# Altium PCB lab3_kulikov_heat_control.PcbDoc (part 1 of 2)
Units mm, origin at the board's own origin, x right, y up, seen from the top; angles counter-clockwise.
Board outline 100 x 67.25 mm, 4 copper layers (Top Layer, Signal Layer 1, Signal Layer 2, Bottom Layer), stack 1.522 mm thick; 68 components, 52 nets, 265 pads, 1135 vias.
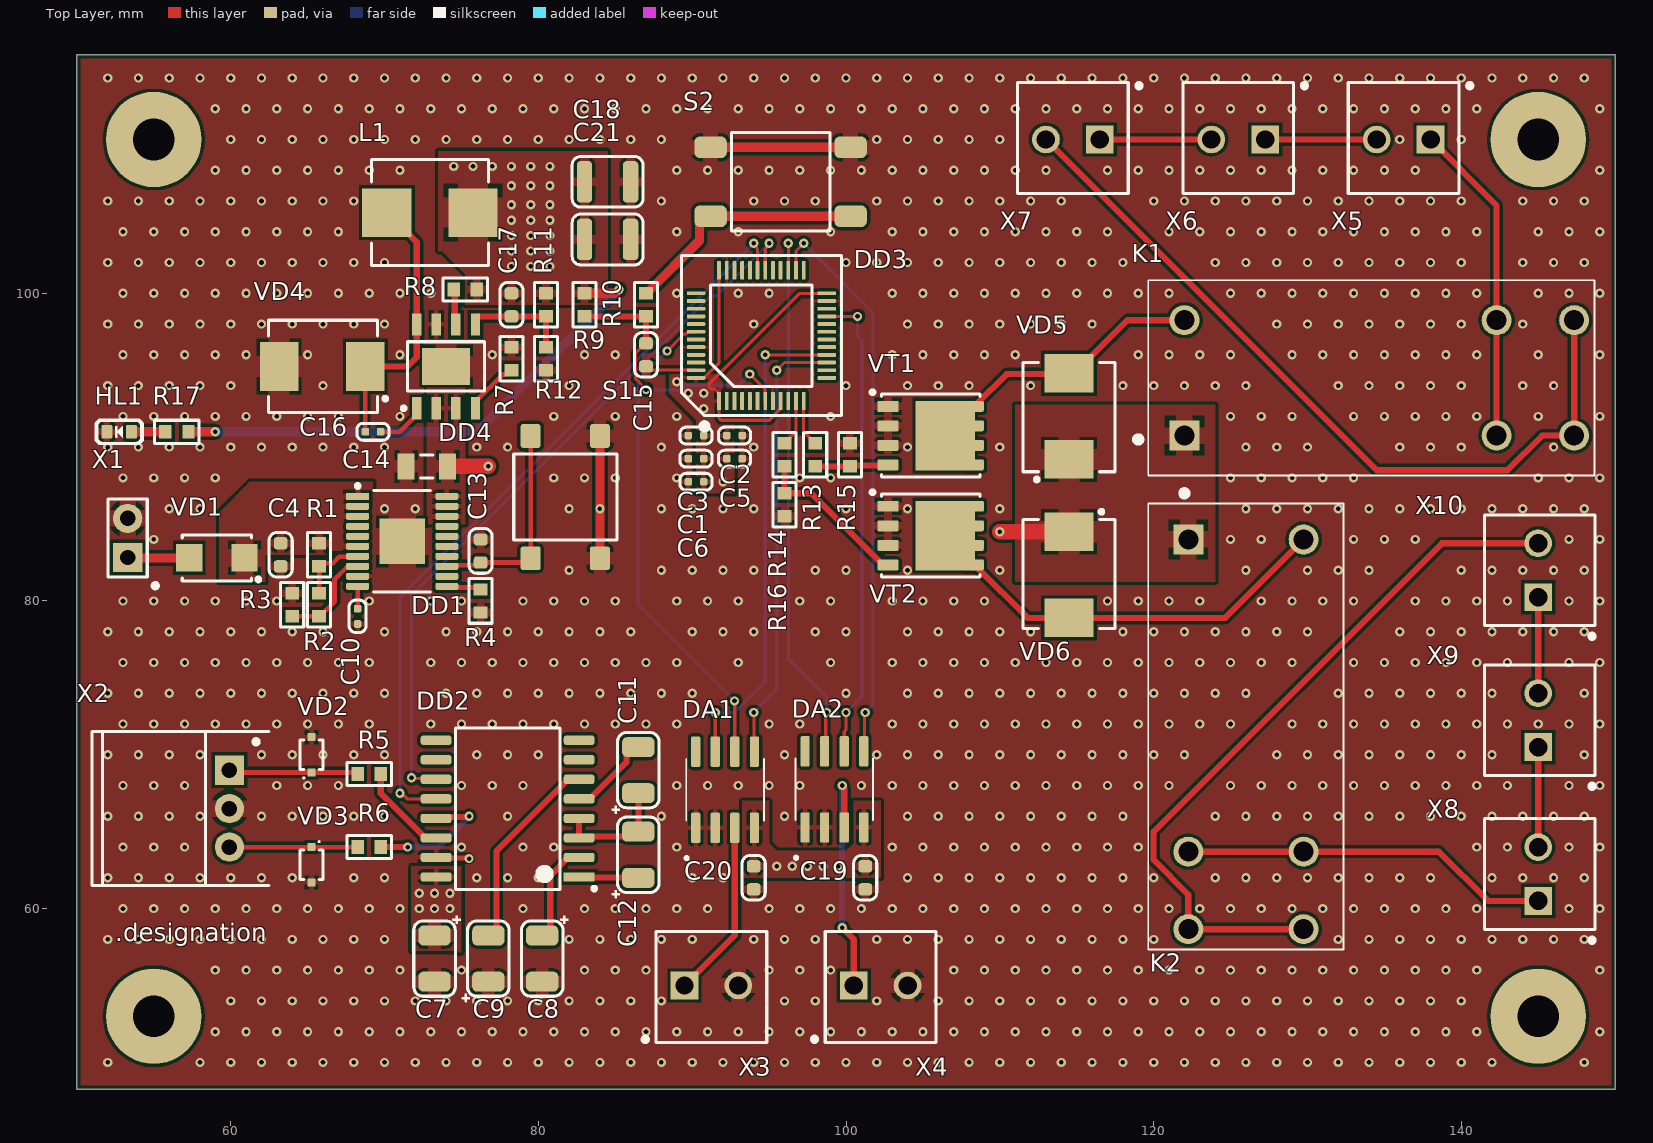
[diagram p0: Top Layer view]
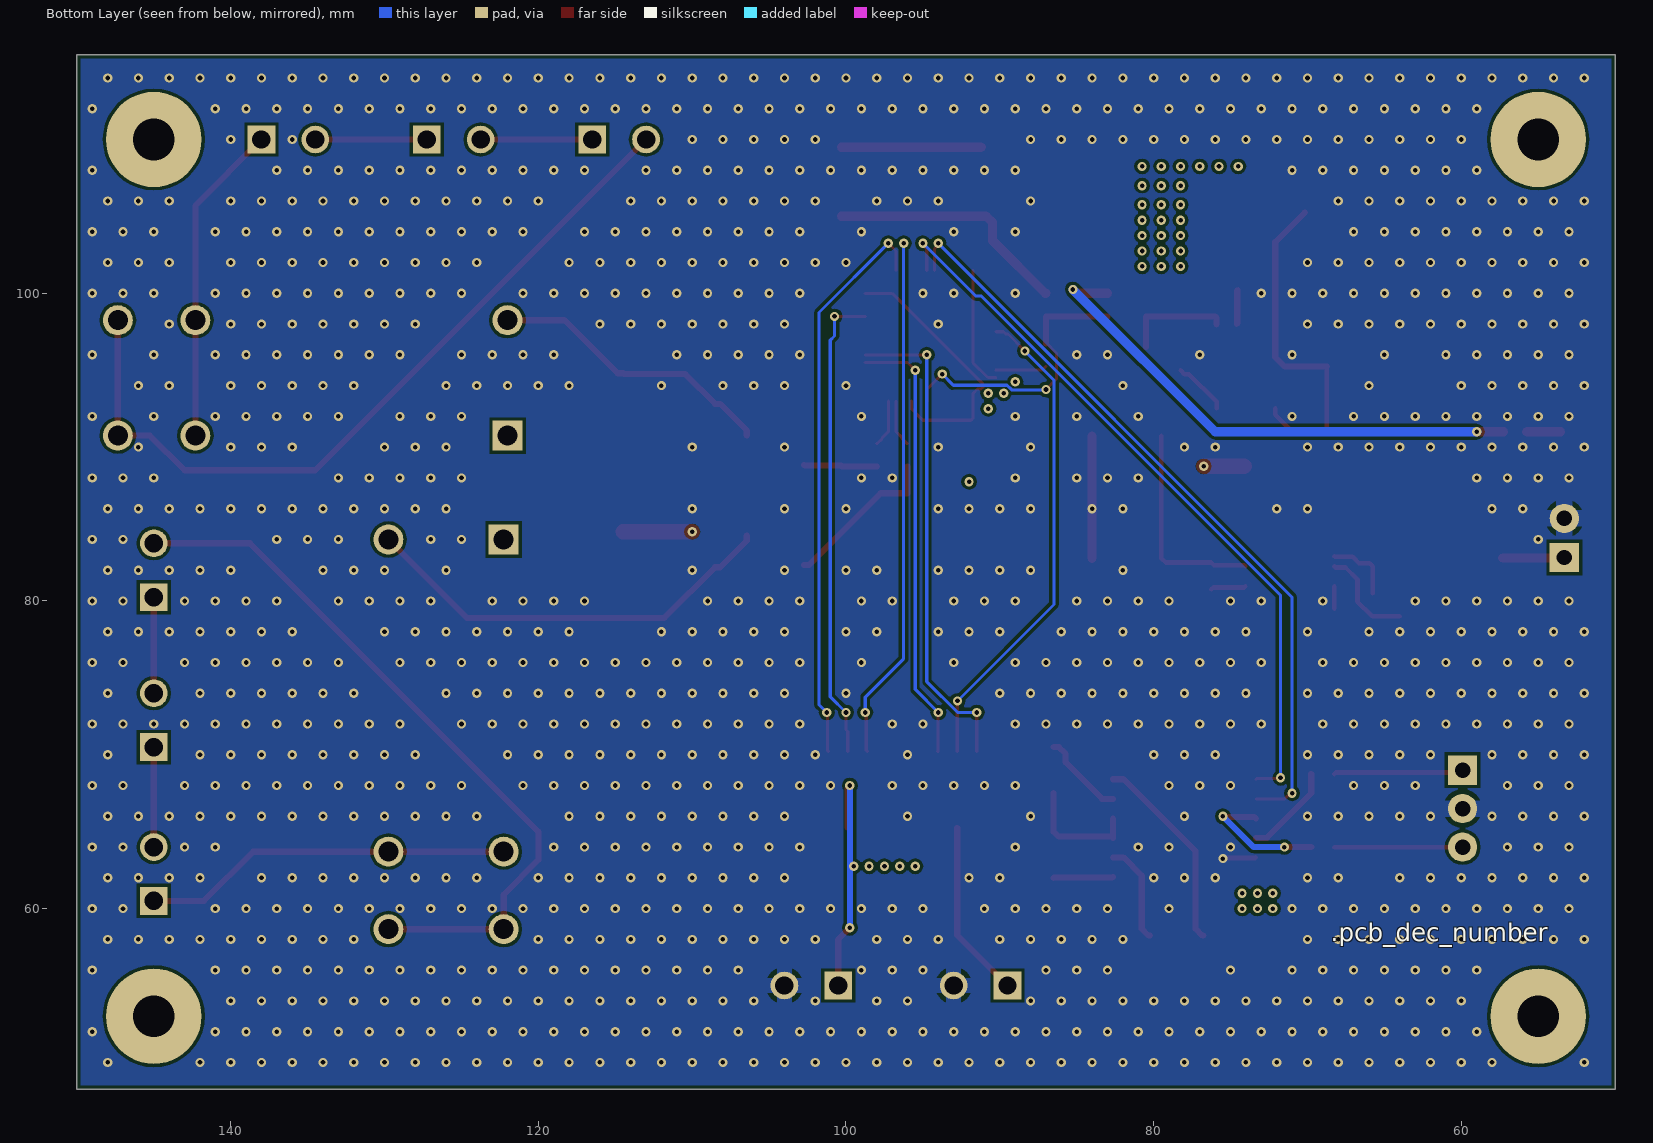
[diagram p1: Bottom Layer view, seen from below]
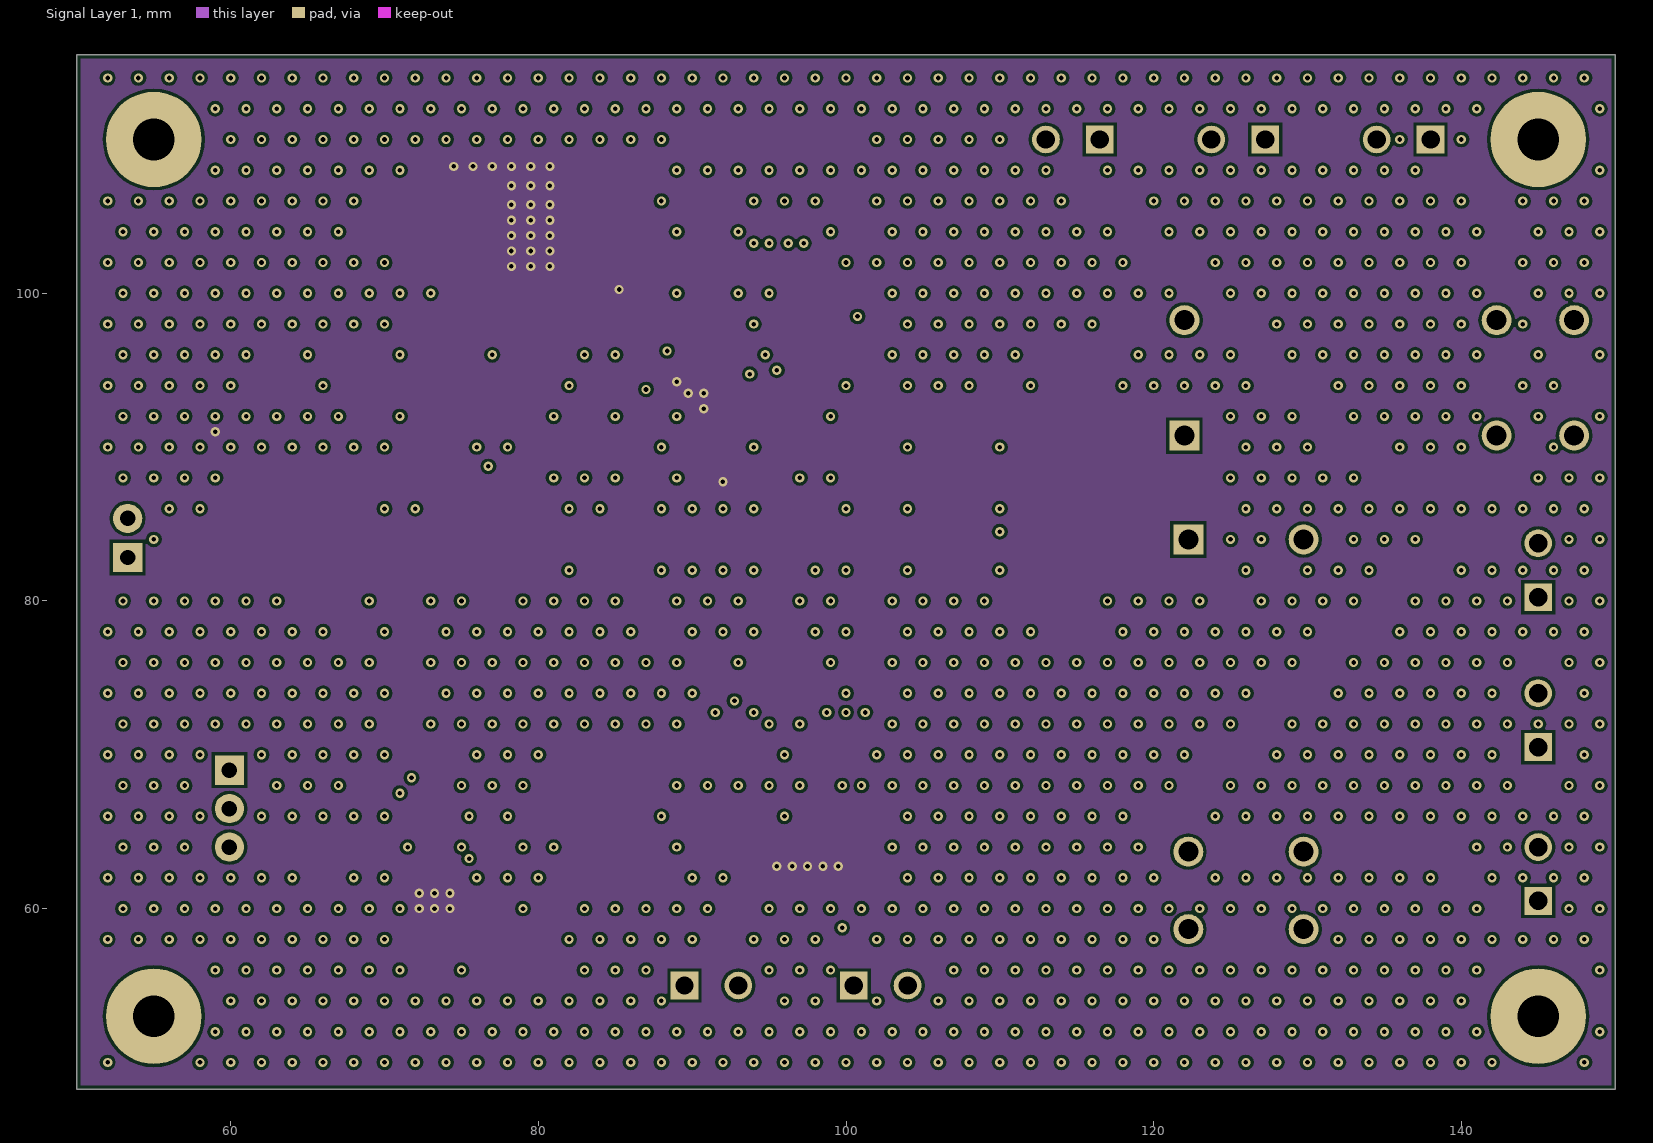
[diagram p2: Signal Layer 1]
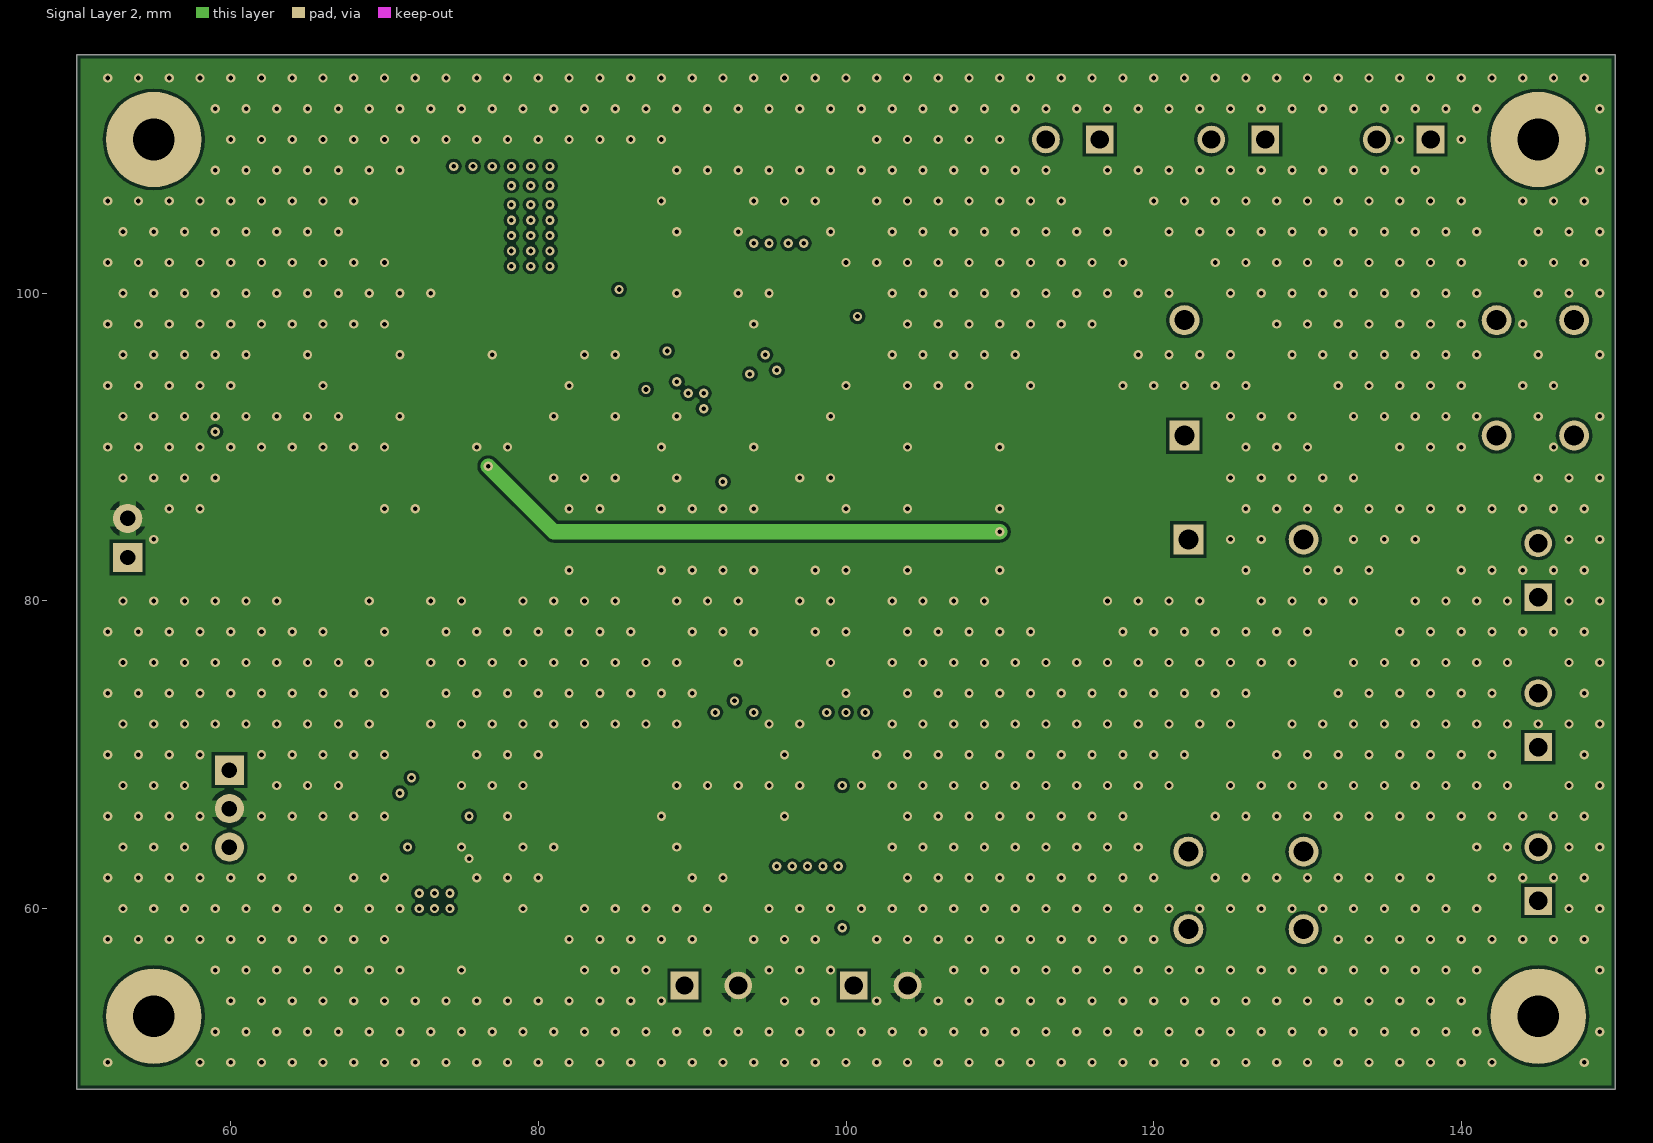
[diagram p3: Signal Layer 2]
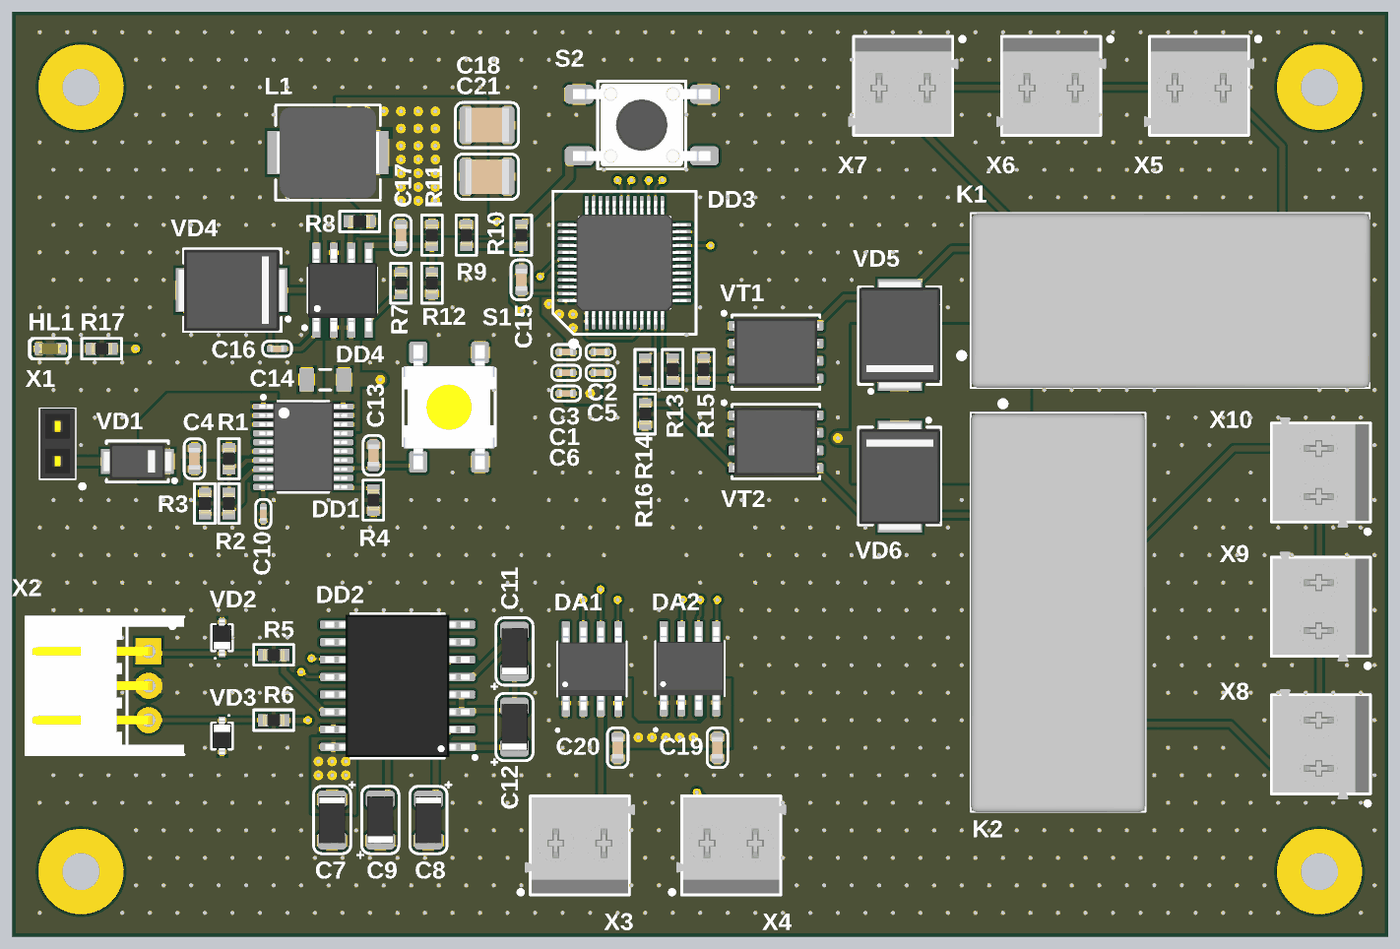
[diagram p4: 3D render of the assembled board from above, using the file's embedded part models]

## Layer stack, top to bottom
Top Solder: solder mask 0.0102, Solder Resist, Dk 3.5
Top Layer: signal copper 0.018
Prepreg 1: prepreg 0.125, FR4 HiTg170, Dk 5.07
Signal Layer 1: signal copper 0.018
Core 1: core 1.2, FR4, Dk 4.6
Signal Layer 2: signal copper 0.018
Prepreg 2: prepreg 0.125, FR4 HiTg170, Dk 5.07
Bottom Layer: signal copper 0.018
Bottom Solder: solder mask 0.0102, Solder Resist, Dk 3.5

## Board outline
50,48.25 50,115.5 150,115.5 150,48.25

## Design rules (kind name [scope] priority, off if disabled: settings)
AcuteAngle min_acute_angle [OnCopper] p1: minimum=3.50000000000000E+0001 checktracksonly=FALSE // Минимальный угол между примитивами топологии
BoardOutlineClearance board_outline_clearance_std [NOT (OnLayer('Bottom Overlay') OR OnLayer('Top Overlay'))] p1: gap=0.25 ignorepadtopadclearanceinfootprint=FALSE except(0: Arc-SplitContinuation Track-SplitContinuation SMDPad-SplitContinuation THPad-SplitContinuation Via-SplitContinuation Fill-SplitContinuation Poly-SplitContinuation Region-SplitContinuation Text-SplitContinuation) // Отступ элементов топологии от края фрезеруемой печатной платы
Clearance clearance_outer_18um_std [OnTopLayer OR OnBottomLayer] p1: gap=0.125 ignorepadtopadclearanceinfootprint=TRUE except(0.2: Arc-Fill Arc-Poly Track-Fill Track-Poly SMDPad-SMDPad SMDPad-Fill SMDPad-Poly THPad-Fill THPad-Poly Via-Fill Via-Poly Fill-Fill Fill-Poly Poly-Poly Poly-Region Poly-Text; 0.25: Arc-Hole Track-Hole SMDPad-Hole THPad-Hole Via-Hole Fill-Hole Poly-Hole Region-Hole Text-Hole) // Зазоры на внешних слоях
Clearance clearance_inner_18um_std [NOT (OnTopLayer Or OnBottomLayer)] p2: gap=0.125 ignorepadtopadclearanceinfootprint=FALSE except(0.2: Arc-Fill Arc-Poly Track-Fill Track-Poly SMDPad-SMDPad SMDPad-Fill SMDPad-Poly THPad-Fill THPad-Poly Via-Fill Via-Poly Fill-Fill Fill-Poly Poly-Poly Poly-Region Poly-Text; 0.25: Arc-Hole Track-Hole SMDPad-Hole THPad-Hole Via-Hole Fill-Hole Poly-Hole Region-Hole Text-Hole) // Зазоры на внутренних слоях
ComponentClearance [All] p1: gap=0 collisioncheckmode=3 verticalgap=0 showdistances=FALSE
DiffPairsRouting diff_pairs_routing [All] p1: maxlimit=0.254 minlimit=0.127 mostfreqgap=0.254 toplayer_maxgap=0.127 toplayer_prefgap=0.127 toplayer_minwidth=0.143 toplayer_maxwidth=0.143 toplayer_prefwidth=0.143 midlayer1_minwidth=0.381 midlayer1_maxwidth=0.381 midlayer1_prefwidth=0.381 midlayer2_minwidth=0.381 midlayer2_maxwidth=0.381 midlayer2_prefwidth=0.381 bottomlayer_maxgap=0.127 bottomlayer_prefgap=0.127 bottomlayer_minwidth=0.143 bottomlayer_maxwidth=0.143 bottomlayer_prefwidth=0.143 impedanceprofiledriven=TRUE impedanceprofileid={FD46899E-B5A2-4EF5-A302-5D2DB6A51F35} maxuncoupledlength=12.7 // Правила трассировки дифференциальных пар
HoleSize min_hole_size_std [IsPad] p1: absolutevalues=TRUE maxlimit=5.9 minlimit=0.6 maxpercent=80.000 minpercent=20.000 // Диаметр межслойного переходного отверстия
HoleSize min_hole_size_via_std [IsVia] p2: absolutevalues=TRUE maxlimit=5.9 minlimit=0.3 maxpercent=80.000 minpercent=20.000 // Минимальный диаметр монтажного отверстия
HoleToHoleClearance hole_to_hole_clearance_std [All] p1: gap=0.2 allowstackedmicrovias=FALSE // Минимальное расстояние между краями двух отверстий
MinimumAnnularRing min_via_ar_std [All] p1: minimumring=0.15 // Поясок площадки переходного отверстия (Annular ring VIA)
MinimumAnnularRing min_pad_ar_std [All] p2: minimumring=0.2 // Поясок монтажной контактной площадки (Annular ring PAD)
MinimumSolderMaskSliver min_solder_mask_bridge_std [All] p1: minsoldermaskwidth=0.15 // Мнимальная ширина масочного мостика
PlaneClearance plane_clearance_18um_std [All] p1: clearance=0.2 // Отступ полигона (для слоя plane) от элементов топологии
PlaneConnect [All] p1: planeconnectstyle=Relief reliefexpansion=0.5 reliefentries=4 reliefconductorwidth=0.2 reliefairgap=0.2
PolygonConnect poly_connect_to_pad<=0.3 [(AsMM(PadXSize_AllLayers)<=0.301) or (AsMM(PadYSize_AllLayers)<=0.301)] p1: thpad.connectstyle=Relief thpad.reliefconductorwidth=0.2 thpad.reliefentries=4 thpad.polygonreliefangle="90 Angle" thpad.airgapwidth=0.2 smdpad.connectstyle=Relief smdpad.reliefconductorwidth=0.2 smdpad.reliefentries=4 smdpad.polygonreliefangle="90 Angle" smdpad.airgapwidth=0.2 via.connectstyle=Direct via.reliefconductorwidth=0.254 via.reliefentries=4 via.polygonreliefangle="90 Angle" via.airgapwidth=0.254 // Правила подключения полигонов для падов от 0,3мм и меньше
PolygonConnect poly_connect_to_pad<=0.4 [(AsMM(PadXSize_AllLayers)<=0.401) or (AsMM(PadYSize_AllLayers)<=0.401)] p2: thpad.connectstyle=Relief thpad.reliefconductorwidth=0.26 thpad.reliefentries=4 thpad.polygonreliefangle="90 Angle" thpad.airgapwidth=0.2 smdpad.connectstyle=Relief smdpad.reliefconductorwidth=0.26 smdpad.reliefentries=4 smdpad.polygonreliefangle="90 Angle" smdpad.airgapwidth=0.2 via.connectstyle=Direct via.reliefconductorwidth=0.254 via.reliefentries=4 via.polygonreliefangle="90 Angle" via.airgapwidth=0.254 // Правила подключения полигонов для падов от 0,4 и меньше
PolygonConnect poly_connect_to_pad<=0.6 [(AsMM(PadXSize_AllLayers)<=0.601) or (AsMM(PadYSize_AllLayers)<=0.601)] p3: thpad.connectstyle=Relief thpad.reliefconductorwidth=0.33 thpad.reliefentries=4 thpad.polygonreliefangle="90 Angle" thpad.airgapwidth=0.2 smdpad.connectstyle=Relief smdpad.reliefconductorwidth=0.33 smdpad.reliefentries=4 smdpad.polygonreliefangle="90 Angle" smdpad.airgapwidth=0.2 via.connectstyle=Direct via.reliefconductorwidth=0.254 via.reliefentries=4 via.polygonreliefangle="90 Angle" via.airgapwidth=0.254 // Правила подключения полигонов для падов от 0,6мм и меньше
PolygonConnect poly_connect_to_pad<=0.7 [(AsMM(PadXSize_AllLayers)<=0.701) or (AsMM(PadYSize_AllLayers)<=0.701)] p4: thpad.connectstyle=Relief thpad.reliefconductorwidth=0.46 thpad.reliefentries=4 thpad.polygonreliefangle="90 Angle" thpad.airgapwidth=0.2 smdpad.connectstyle=Relief smdpad.reliefconductorwidth=0.46 smdpad.reliefentries=4 smdpad.polygonreliefangle="90 Angle" smdpad.airgapwidth=0.2 via.connectstyle=Direct via.reliefconductorwidth=0.254 via.reliefentries=4 via.polygonreliefangle="90 Angle" via.airgapwidth=0.254 // Правила подключения полигонов для падов от 0,7мм и меньше
PolygonConnect poly_connect_to_pad<=0.8 [(AsMM(PadXSize_AllLayers)<=0.8)or(AsMM(PadYSize_AllLayers)<=0.8)] p5: thpad.connectstyle=Relief thpad.reliefconductorwidth=0.53 thpad.reliefentries=4 thpad.polygonreliefangle="90 Angle" thpad.airgapwidth=0.3 smdpad.connectstyle=Relief smdpad.reliefconductorwidth=0.53 smdpad.reliefentries=4 smdpad.polygonreliefangle="90 Angle" smdpad.airgapwidth=0.2 via.connectstyle=Direct via.reliefconductorwidth=0.254 via.reliefentries=4 via.polygonreliefangle="90 Angle" via.airgapwidth=0.254 // Правила подключения полигонов для падов от 0,8мм и меньше
PolygonConnect poly_connect_to_pad<=1 [(AsMM(PadXSize_AllLayers)<=1.01)or(AsMM(PadYSize_AllLayers)<=1.01)] p6: thpad.connectstyle=Relief thpad.reliefconductorwidth=0.6 thpad.reliefentries=4 thpad.polygonreliefangle="90 Angle" thpad.airgapwidth=0.3 smdpad.connectstyle=Relief smdpad.reliefconductorwidth=0.6 smdpad.reliefentries=4 smdpad.polygonreliefangle="90 Angle" smdpad.airgapwidth=0.2 via.connectstyle=Direct via.reliefconductorwidth=0.254 via.reliefentries=4 via.polygonreliefangle="90 Angle" via.airgapwidth=0.254 // Правила подключения полигонов для падов от 1мм и меньше
PolygonConnect poly_connect_to_pad<=1.3 [(AsMM(PadXSize_AllLayers)<=1.31)or(AsMM(PadYSize_AllLayers)<=1.31)] p7: thpad.connectstyle=Relief thpad.reliefconductorwidth=0.66 thpad.reliefentries=4 thpad.polygonreliefangle="90 Angle" thpad.airgapwidth=0.3 smdpad.connectstyle=Relief smdpad.reliefconductorwidth=0.86 smdpad.reliefentries=4 smdpad.polygonreliefangle="90 Angle" smdpad.airgapwidth=0.2 via.connectstyle=Direct via.reliefconductorwidth=0.254 via.reliefentries=4 via.polygonreliefangle="90 Angle" via.airgapwidth=0.254 // Правила подключения полигонов для падов от 1,3мм и меньше
PolygonConnect poly_connect_to_pad<=1.6 [(AsMM(PadXSize_AllLayers)<=1.61)or(AsMM(PadYSize_AllLayers)<=1.61)] p8: thpad.connectstyle=Relief thpad.reliefconductorwidth=0.8 thpad.reliefentries=4 thpad.polygonreliefangle="90 Angle" thpad.airgapwidth=0.3 smdpad.connectstyle=Relief smdpad.reliefconductorwidth=1 smdpad.reliefentries=4 smdpad.polygonreliefangle="90 Angle" smdpad.airgapwidth=0.2 via.connectstyle=Direct via.reliefconductorwidth=0.254 via.reliefentries=4 via.polygonreliefangle="90 Angle" via.airgapwidth=0.254 // Правила подключения полигонов для падов от 1,6мм и меньше
PolygonConnect poly_connect_to_pad<=1.8 [(AsMM(PadXSize_AllLayers)<=1.8)or(AsMM(PadYSize_AllLayers)<=1.8)] p9: thpad.connectstyle=Relief thpad.reliefconductorwidth=1 thpad.reliefentries=4 thpad.polygonreliefangle="90 Angle" thpad.airgapwidth=0.3 smdpad.connectstyle=Relief smdpad.reliefconductorwidth=1.2 smdpad.reliefentries=4 smdpad.polygonreliefangle="90 Angle" smdpad.airgapwidth=0.2 via.connectstyle=Direct via.reliefconductorwidth=0.254 via.reliefentries=4 via.polygonreliefangle="90 Angle" via.airgapwidth=0.254 // Правила подключения полигонов для падов от 1,8мм и меньше
PolygonConnect poly_connect_to_pad<=2 [(AsMM(PadXSize_AllLayers)<=2.01)or(AsMM(PadYSize_AllLayers)<=2.01)] p10: thpad.connectstyle=Relief thpad.reliefconductorwidth=1.1 thpad.reliefentries=4 thpad.polygonreliefangle="90 Angle" thpad.airgapwidth=0.3 smdpad.connectstyle=Relief smdpad.reliefconductorwidth=1.4 smdpad.reliefentries=4 smdpad.polygonreliefangle="90 Angle" smdpad.airgapwidth=0.2 via.connectstyle=Direct via.reliefconductorwidth=0.254 via.reliefentries=4 via.polygonreliefangle="90 Angle" via.airgapwidth=0.254 // Правила подключения полигонов для падов от 2мм и меньше
PolygonConnect poly_connect_to_pad<=2.3 [(AsMM(PadXSize_AllLayers)<=2.31)or(AsMM(PadYSize_AllLayers)<=2.31)] p11: thpad.connectstyle=Relief thpad.reliefconductorwidth=1.2 thpad.reliefentries=4 thpad.polygonreliefangle="90 Angle" thpad.airgapwidth=0.3 smdpad.connectstyle=Relief smdpad.reliefconductorwidth=1.4 smdpad.reliefentries=4 smdpad.polygonreliefangle="90 Angle" smdpad.airgapwidth=0.2 via.connectstyle=Direct via.reliefconductorwidth=0.254 via.reliefentries=4 via.polygonreliefangle="90 Angle" via.airgapwidth=0.254 // Правила подключения полигонов для падов от 2,3мм и меньше
PolygonConnect poly_connect_to_pad<=2.5 [(AsMM(PadXSize_AllLayers)<=2.51)or(AsMM(PadYSize_AllLayers)<=2.51)] p12: thpad.connectstyle=Relief thpad.reliefconductorwidth=1.2 thpad.reliefentries=4 thpad.polygonreliefangle="90 Angle" thpad.airgapwidth=0.3 smdpad.connectstyle=Relief smdpad.reliefconductorwidth=1.4 smdpad.reliefentries=4 smdpad.polygonreliefangle="90 Angle" smdpad.airgapwidth=0.2 via.connectstyle=Direct via.reliefconductorwidth=0.254 via.reliefentries=4 via.polygonreliefangle="90 Angle" via.airgapwidth=0.254 // Правила подключения полигонов для падов от 2,5мм и меньше
PolygonConnect poly_connect_to_pad<=2.7 [(AsMM(PadXSize_AllLayers)<=2.71)or(AsMM(PadYSize_AllLayers)<=2.71)] p13: thpad.connectstyle=Relief thpad.reliefconductorwidth=1.4 thpad.reliefentries=4 thpad.polygonreliefangle="90 Angle" thpad.airgapwidth=0.3 smdpad.connectstyle=Relief smdpad.reliefconductorwidth=1.6 smdpad.reliefentries=4 smdpad.polygonreliefangle="90 Angle" smdpad.airgapwidth=0.2 via.connectstyle=Direct via.reliefconductorwidth=0.254 via.reliefentries=4 via.polygonreliefangle="90 Angle" via.airgapwidth=0.254 // Правила подключения полигонов для падов от 2,7мм и меньше
PolygonConnect poly_connect_to_pad<=3 [(AsMM(PadXSize_AllLayers)<=3.01)or(AsMM(PadYSize_AllLayers)<=3.01)] p14: thpad.connectstyle=Relief thpad.reliefconductorwidth=1.6 thpad.reliefentries=4 thpad.polygonreliefangle="90 Angle" thpad.airgapwidth=0.3 smdpad.connectstyle=Relief smdpad.reliefconductorwidth=1.8 smdpad.reliefentries=4 smdpad.polygonreliefangle="90 Angle" smdpad.airgapwidth=0.2 via.connectstyle=Direct via.reliefconductorwidth=0.254 via.reliefentries=4 via.polygonreliefangle="90 Angle" via.airgapwidth=0.254 // Правила подключения полигонов для падов от 3мм и меньше
PolygonConnect poly_connect_to_pad<=7 [(AsMM(PadXSize_AllLayers)<7.01)or(AsMM(PadYSize_AllLayers)<=7.01)] p15: thpad.connectstyle=Relief thpad.reliefconductorwidth=2 thpad.reliefentries=4 thpad.polygonreliefangle="90 Angle" thpad.airgapwidth=0.4 smdpad.connectstyle=Relief smdpad.reliefconductorwidth=2 smdpad.reliefentries=4 smdpad.polygonreliefangle="90 Angle" smdpad.airgapwidth=0.3 via.connectstyle=Direct via.reliefconductorwidth=0.254 via.reliefentries=4 via.polygonreliefangle="90 Angle" via.airgapwidth=0.254 // Правила подключения полигонов для падов от 7мм и меньше
PolygonConnect poly_connect_to_pad [All] p16: thpad.connectstyle=Relief thpad.reliefconductorwidth=0.25 thpad.reliefentries=4 thpad.polygonreliefangle="90 Angle" thpad.airgapwidth=0.2 smdpad.connectstyle=Relief smdpad.reliefconductorwidth=0.25 smdpad.reliefentries=4 smdpad.polygonreliefangle="90 Angle" smdpad.airgapwidth=0.2 via.connectstyle=Direct via.reliefconductorwidth=0.25 via.reliefentries=4 via.polygonreliefangle="90 Angle" via.airgapwidth=0.2 // Правила подключения полигонов общие
RoutingCorners [All] p1 off: cornerstyle=45-Degree minsetback=2.5 maxsetback=2.5
RoutingVias [All] p1: holewidth=0.3 width=0.6 viastyle="Through Hole" minholewidth=0.3 minwidth=0.6 maxholewidth=5.9 maxwidth=6.4
SilkToSilkClearance silk_to_silk_clearance_std [All] p1 off: silktosilkclearance=0.15 // Отступ текста шелкографии от других примитивов шелкографии
SilkToSolderMaskClearance silk_to_solder_mask_clearance_std [IsPad] p1 off: minsilkscreentomaskgap=0.15 clearancetoexposedcopper=FALSE // Минимальное расстояние между элементами шелкографии и вскрытой медью
SolderMaskExpansion solder_mask_expansion_std [All] p1: expansion=0.05 // Припуск паяльной масски
UnRoutedNet [All] p1: checkbadconnections=TRUE
Width width_18um_std [All] p1: maxlimit=10 minlimit=0.125 preferedwidth=0.15 checkconnectedcopper=TRUE // Ширина проводников (общая)
19 further rules are at their usual default settings.

## Components (designator, comment, footprint, x,y, rotation, side; value= is the part's Value field where it differs from the comment)
C1 "0,1 мк" C0402 90.25,89.25 r180 top
C2 "0,1 мк" C0402 92.75,90.75 r0 top
C3 "0,1 мк" C0402 90.25,90.75 r180 top
C4 "0,1 мк" C0603 63.25,83 r270 top
C5 "0,1 мк" C0402 92.75,89.25 r0 top
C6 "0,1 мк" C0402 90.25,87.75 r180 top
C7 "0,1 мк" C3216-18 73.25,56.75 r270 top
C8 "0,1 мк" C3216-18 80.25,56.75 r270 top
C9 "0,1 мк" C3216-18 76.75,56.75 r90 top
C10 "6800" C0402 68.25,79 r270 top
C11 "0,1 мк" C3216-18 86.5,69 r90 top
C12 "0,1 мк" C3216-18 86.5,63.5 r90 top
C13 "0,1 мк" C0603 76.25,83.25 r90 top
C14 "4,7 мк" C1206 72.75,88.75 r180 top
C15 "0,1 мк" C0603 87,96 r270 top
C16 "0,1 мк" C0402 69.25,91 r0 top
C17 "390 п" C0603 78.25,99.25 r270 top
C18 "47 мк" C1210 84.5,107.25 r0 top
C19 "0,1 мк" C0603 101.25,62 r270 top
C20 "0,1 мк" C0603 94,62 r270 top
C21 "47 мк" C1210 84.5,103.5 r0 top
DA1 "MAX6675ISA" SOIC127P600X175-8N 92.135,67.725 r90 top
DA2 "MAX6675ISA" SOIC127P600X175-8N 99.25,67.75 r90 top
DD1 "TPS16630PWPR" HTSSOP-20-P65-650X440X120-L63X25-T296X296 71.15,83.875 r0 top
DD2 "MAX3232CDW" SOIC-16-P127-1030X750X265-L84X41 78,66.5 r180 top
DD3 "STM32F103CBT6" LQFP-48-P50-700X700X160-L60X22 94.5,97.25 r90 top
DD4 "LMR16020" SOIC127P600X170_HS-9N 74,95.25 r90 top
HL1 "TLMS1000-GS08" HL0603 52.75,91 r0 top
K1 "3-1393240-5" TE_3-1393240-5 122,94.5 r0 top
K2 "3-1393240-5" TE_3-1393240-5 126,84 r270 top
L1 "SRP7028A-150M" SRP-2-730X660X280 72.95,105.25 r0 top
R1 "330 к" R0603 65.75,83 r90 top
R2 "6,04 к" R0603 65.75,79.75 r90 top
R3 "15 к" R0603 64,79.75 r270 top
R4 "47 к" R0603 76.25,80 r90 top
R5 "22" R0603 69,68.75 r180 top
R6 "22" R0603 69,64 r180 top
R7 "68 к" R0603 78.25,95.75 r270 top
R8 "20 к" R0603 75.25,100.25 r0 top
R9 "47 к" R0603 83,99.25 r90 top
R10 "100" R0603 87,99.25 r90 top
R11 "68 к" R0603 80.5,99.25 r90 top
R12 "1 к" R0603 80.5,95.75 r90 top
R13 "1 к" R0603 98,89.5 r270 top
R14 "1 к" R0603 96,89.5 r270 top
R15 "10 к" R0603 100.25,89.5 r270 top
R16 "10 к" R0603 96,86.25 r90 top
R17 "10 к" R0603 56.5,91 r0 top
S1 "B3S-1002" B3S-1002 81.75,86.75 r270 top
S2 "FSM4JSMA" FSM4JSMA 95.75,107.25 r180 top
VD1 "SL13-E3/5AT" DO-214AC-510X270X229 59.1,82.8 r180 top
VD2 "SD12C-01FTG" SOD-323-257X130X114 65.25,70 r90 top
VD3 "SD12C-01FTG" SOD-323-257X130X114 65.25,62.85 r270 top
VD4 "SS36-E3/57T" DO-214AB-790X590X262 65.95,95.25 r180 top
VD5 "SS36-E3/57T" DO-214AB-790X590X262 114.5,92 r90 top
VD6 "SS36-E3/57T" DO-214AB-790X590X262 114.5,81.7 r270 top
VT1 "CSD19532Q5BT" VSONP-8-P127-600X500X105 105.5,90.75 r270 top
VT2 "CSD19532Q5BT" VSONP-8-P127-600X500X105 105.5,84.25 r270 top
X1 "DS1023-1x2SF11" DS1023-1X2SF11 53.3,84.095 r90 top
X2 "DS1069-3MRW6XA" DS1069-3MRW6XA 56.75,66.5 r270 top
X3 "1776275-2" 1776275-2 91.25,54.9 r0 top
X4 "1776275-2" 1776275-2 102.25,54.9 r0 top
X5 "1776275-2" 1776275-2 136.25,110.1 r180 top
X6 "1776275-2" 1776275-2 125.5,110.1 r180 top
X7 "1776275-2" 1776275-2 114.75,110.1 r180 top
X8 "1776275-2" 1776275-2 145.1,62.25 r90 top
X9 "1776275-2" 1776275-2 145.1,72.25 r90 top
X10 "1776275-2" 1776275-2 145.1,82 r90 top

## Footprints (in the part's own frame and the unit in brackets; to place one, negate y for a bottom-side part, rotate by r counter-clockwise, add the part's x,y. Pads: shape width x height; smd on the part's side, far side on the other; paste and mask are expansions set on the pad)
1776275-2 [mm] "PCB Terminal Blocks, Header, Wire-to-Board, 2 Pins, 3.5mm, 1 Row, Side Wire Entry Angle, 26 – 18AWG Wire Size"
  rect 1.8x1.8 hole 1.2: 1(-1.75,0.1)
  round 1.8 hole 1.2: 2(1.75,0.1)
  silkscreen extent -4.3,-3.6 3.6,3.6, body extent -4,-3.5 4,3.5, height 8.3
B3S-1002 [mm]
  rrect25% 1.55x1.3 smd: 1(-3.975,2.25) 1(3.975,2.25) 2(-3.975,-2.25) 2(3.975,-2.25)
  silkscreen extent -2.79,-3.35 2.79,3.35, body extent -4.51,-3.3 4.51,3.3, height 4.3
C0402 [mm] "Chip Capacitor, 2-Leads, Body 1,00x0,50mm, IPC Medium Density"
  rrect50% 0.5x0.5 smd: 1(-0.5,0) 2(0.5,0)
  silkscreen extent -1.05,-0.55 1.05,0.55, body extent -0.5,-0.25 0.5,0.25, height 0.5
C0603 [mm] "Chip Capacitor, 2-Leads, Body 1,60x0,80mm, IPC Medium Density"
  rrect50% 0.8x0.9 smd: 1(-0.75,0) 2(0.75,0)
  silkscreen extent -1.45,-0.75 1.45,0.75, body extent -0.8,-0.4 0.8,0.4, height 0.8
C1206 [mm] "Chip Capacitor, Body 3.2x1.6mm, IPC High Density"
  rect 1.1x1.7 smd: 1(-1.35,0) 2(1.35,0)
  silkscreen extent -0.4,-0.75 0.4,0.75, body extent -1.7,-0.9 1.7,0.9, height 1.3
C1210 [mm] "Chip Capacitor, 2-Leads, Body 3,20x2,50mm, IPC Medium Density"
  rrect50% 1x2.7 smd: 1(-1.5,0) 2(1.5,0)
  silkscreen extent -2.3,-1.65 2.3,1.65, body extent -1.6,-1.25 1.6,1.25, height 0.78
C3216-18 [mm] "Chip Tantalum Capacitor, 2-Leads, Body 3,20x1,60mm, IPC Medium Density"
  rrect50% 1.3x2.1 smd: 1(-1.5,0) 2(1.5,0)
  silkscreen extent -2.8,-1.35 2.45,1.7, body extent -1.7,-0.95 1.7,0.95, height 1.83
DO-214AB-790X590X262 [mm] "Molded Diode, 2-Leads, Body 7,90x5,90mm, IPC Medium Density"
  rect 2.5x3.2 smd: 1(-2.8,0) 2(2.8,0)
  silkscreen extent -4.23,-3 3.5,3, body extent -3.95,-2.95 3.95,2.95, height 2.59
DO-214AC-510X270X229 [mm] "Molded Diode, 2-Leads, Body 5,10x2,70mm, IPC Medium Density"
  rect 1.7x1.8 smd: 1(-1.8,0) 2(1.8,0)
  silkscreen extent -2.83,-1.5 2.25,1.52, body extent -2.55,-1.3 2.55,1.3, height 2.26
DS1023-1X2SF11 [mm] "PBS 2 Pins 2,54mm Socket Header V/T Blanking Type"
  rect 1.9x1.9 hole 1: 1(-1.27,0)
  round 1.9 hole 1: 2(1.27,0)
  silkscreen extent -3.1,-1.8 2.55,1.28, body extent -2.54,-1.27 2.54,1.27, height 8.5
DS1069-3MRW6XA [mm] "CWF 3 Pins Plug Header, Pitch 2,5mm, R/A Type, Type A"
  rect 1.9x1.9 hole 1: 1(-2.5,3.164)
  round 1.9 hole 1: 2(0,3.164) 3(2.5,3.164)
  silkscreen extent -5,-5.76 5,5.74, body extent -5,-5.76 5,5.74, height 5.85
FSM4JSMA [mm]
  rrect50% 2.1x1.4 smd: 1(-4.55,2.24) 1(4.55,2.24) 2(-4.55,-2.24) 2(4.55,-2.24)
  silkscreen extent -3.2,-3.2 3.2,3.2, body extent -5,-3 5,3, height 5.13
HL0603 [mm] "Chip Resistor, 2-Leads, Body 1,60x0,80mm, IPC Medium Density"
  rrect25% 0.7x0.9 smd: 1(-0.8,0) 2(0.8,0)
  silkscreen extent -1.5,-0.75 1.5,0.75, body extent -0.81,-0.4 0.81,0.4, height 0.64
HTSSOP-20-P65-650X440X120-L63X25-T296X296 [mm] "TSOP, 20-Leads, Body 6,50x4,40mm, Pitch 0,65mm, Thermal Pad 2.96x2.96mm, IPC Medium Density"
  rect 2.96x2.96 smd: 0(0,0)
  rect 1.5x0.45 smd: 1(-2.9,2.925)
  rrect50% 1.5x0.45 smd: 2(-2.9,2.275) 3(-2.9,1.625) 4(-2.9,0.975) 5(-2.9,0.325) 6(-2.9,-0.325) 7(-2.9,-0.975) 8(-2.9,-1.625) 9(-2.9,-2.275) 10(-2.9,-2.925) 11(2.9,-2.925) 12(2.9,-2.275) 13(2.9,-1.625) 14(2.9,-0.975) 15(2.9,-0.325) 16(2.9,0.325) 17(2.9,0.975) 18(2.9,1.625) 19(2.9,2.275) 20(2.9,2.925)
  silkscreen extent -3.02,-3.3 1.85,3.72, body extent -3.2,-3.25 3.2,3.25, height 1.13
LQFP-48-P50-700X700X160-L60X22 [mm] "LQFP, 48-Leads, Body 7,00x7,00mm, Pitch 0,50mm, IPC Medium Density"
  rect 1.2x0.25 smd: 1(-4.25,2.75)
  rrect50% 1.2x0.25 smd: 2(-4.25,2.25) 3(-4.25,1.75) 4(-4.25,1.25) 5(-4.25,0.75) 6(-4.25,0.25) 7(-4.25,-0.25) 8(-4.25,-0.75) 9(-4.25,-1.25) 10(-4.25,-1.75) 11(-4.25,-2.25) 12(-4.25,-2.75) 25(4.25,-2.75) 26(4.25,-2.25) 27(4.25,-1.75) 28(4.25,-1.25) 29(4.25,-0.75) 30(4.25,-0.25) 31(4.25,0.25) 32(4.25,0.75) 33(4.25,1.25) 34(4.25,1.75) 35(4.25,2.25) 36(4.25,2.75)
  rrect50% 0.25x1.2 smd: 13(-2.75,-4.25) 14(-2.25,-4.25) 15(-1.75,-4.25) 16(-1.25,-4.25) 17(-0.75,-4.25) 18(-0.25,-4.25) 19(0.25,-4.25) 20(0.75,-4.25) 21(1.25,-4.25) 22(1.75,-4.25) 23(2.25,-4.25) 24(2.75,-4.25) 37(2.75,4.25) 38(2.25,4.25) 39(1.75,4.25) 40(1.25,4.25) 41(0.75,4.25) 42(0.25,4.25) 43(-0.25,4.25) 44(-0.75,4.25) 45(-1.25,4.25) 46(-1.75,4.25) 47(-2.25,4.25) 48(-2.75,4.25)
  silkscreen extent -6.1,-5.2 5.2,5.2, body extent -4.5,-4.5 4.5,4.5, height 1.61
R0603 [mm] "Chip Resistor, 2-Leads, Body 1,60x0,80mm, IPC Medium Density"
  rect 0.8x0.9 smd: 1(-0.75,0) 2(0.75,0)
  silkscreen extent -1.45,-0.75 1.45,0.75, body extent -0.77,-0.43 0.78,0.43, height 0.43
SOD-323-257X130X114 [mm] "SOD, 2-Leads, Body 2,57x1,30mm, IPC Medium Density"
  rect 0.5x0.5 smd: 1(-1.15,0) 2(1.15,0)
  silkscreen extent -1.55,-0.75 0.95,0.75, body extent -1.3,-0.67 1.3,0.68, height 1.1
SOIC127P600X170_HS-9N [mm] "SOIC, 8-Leads, Body 4,90x3,90mm, Pitch 1,27mm, Thermal Pad 3,10x2,40mm, IPC Medium Density"
  rect 1.45x0.6 smd: 1(-2.725,1.905) 2(-2.725,0.635) 3(-2.725,-0.635) 4(-2.725,-1.905) 5(2.725,-1.905) 6(2.725,-0.635) 7(2.725,0.635) 8(2.725,1.905)
  rect 2.4x3.1 smd: 9(0,0)
  silkscreen extent -2.85,-2.5 1.6,2.88, body extent -3,-2.5 3,2.5, height 1.7
SOIC127P600X175-8N [mm]
  rrect25% 1.97x0.59 smd: 1(-2.475,1.905) 2(-2.475,0.635) 3(-2.475,-0.635) 4(-2.475,-1.905) 5(2.475,-1.905) 6(2.475,-0.635) 7(2.475,0.635) 8(2.475,1.905)
  silkscreen extent -4.54,-2.52 2,2.59, body extent -3,-2.45 3,2.45, height 1.75
SOIC-16-P127-1030X750X265-L84X41 [mm] "SOIC, 16-Leads, Body 10,30x7,50mm, Pitch 1,27mm, IPC Medium Density"
  rect 2x0.6 smd: 1(-4.65,4.445)
  rrect50% 2x0.6 smd: 2(-4.65,3.175) 3(-4.65,1.905) 4(-4.65,0.635) 5(-4.65,-0.635) 6(-4.65,-1.905) 7(-4.65,-3.175) 8(-4.65,-4.445) 9(4.65,-4.445) 10(4.65,-3.175) 11(4.65,-1.905) 12(4.65,-0.635) 13(4.65,0.635) 14(4.65,1.905) 15(4.65,3.175) 16(4.65,4.445)
  silkscreen extent -5.75,-5.25 3.4,5.32, body extent -5.24,-5.17 5.24,5.18, height 2.65
SRP-2-730X660X280 [mm] "Precision Wire Wound Inductor, 2-Leads, Body 7,30x6,60mm, IPC Medium Density"
  rect 3.2x3.15 smd: 1(-2.8,0) 2(2.8,0)
  silkscreen extent -3.8,-3.45 3.8,3.45, body extent -3.7,-3.3 3.7,3.3, height 3
TE_3-1393240-5 [mm]
  round 1.95 hole 1.3: 11(20.3,-3.75) 11-1(20.3,3.75) 14(25.34,-3.75) 14-1(25.34,3.75) A2(0,3.75)
  rect 1.95x1.95 hole 1.3: A1(0,-3.75)
  silkscreen extent -3.2,-6.35 26.65,6.35, body extent -2.31,-6.35 26.69,6.35, height 15.7
VSONP-8-P127-600X500X105 [mm] "VSONP, 8-Leads, Body 6,00x5,00mm, Pitch 1,27mm, Thermal Pad 4,44x4,52mm,IPC Medium Density"
  rrect25% 0.71x1.372 smd paste-10: D(-1.905,2.77) D(-0.635,2.77) D(0.635,2.77) D(1.905,2.77)
  rect 4.52x3.85 smd paste-10: D(0,0.95)
  rrect25% 0.71x1.372 smd paste-0.002: G(1.905,-2.77) S(-0.635,-2.77) S(0.635,-2.77)
  rect 0.71x1.372 smd paste-0.002: S(-1.905,-2.77)
  silkscreen extent -2.83,-3.78 2.7,3.2, body extent -2.45,-3.13 2.45,3.13, height 1.15

## Part data
C1 C2 C3 C5 C6: library part c0080, "=Описание", HelpURL=https://www.yageo.com/upload/media/product/productsearch/datasheet/mlcc/UPY-GPHC_X5R_4V-to-50V_26.pdf, ID=c0080, Корпус=0402, Наименование=CC0402KRX5R6BB104, Напряжение="10 В", Номинал="0,1 мк", Номинальное напряжение="10 В", Описание="Конденсатор керамический чип 0402 100 нФ 10 В ±10 %", Отклонение="±10 %", Производитель="YAGEO Corp.", Рабочие температуры="от –55 °С до +85 °С", Температурный коэффициент емкости=X5R, Фамилия=Паньков
C4: library part c0098, "=Описание", HelpURL=https://www.yageo.com/upload/media/product/productsearch/datasheet/mlcc/UPY-NP0X7R_MV_100-to-630V_22.pdf, ID=c0098, Корпус=1206, Наименование=CC1206KKX7R0BB105, Напряжение="100 В", Номинал="1 мк", Номинальное напряжение="100 В", Описание="Конденсатор керамический чип 1206 1 мкФ 100 В ±10 %", Отклонение="±10 %", Производитель="YAGEO Corp.", Рабочие температуры="от –55 °С до +125 °С", Температурный коэффициент емкости=X7R, Фамилия=Ларионов
C7 C8 C9 C11 C12: library part c0001, "=Описание", HelpURL=https://www.vishay.com/capacitors/list/product-40002/, ID=c0001, Корпус=3216-18, Наименование=293D104X9050A2TE3, Напряжение="50 В", Номинал="0,1 мк", Номинальное напряжение="50 В", Описание="Конденсатор танталовый чип 3216-18 100 нФ 50 В ±10 %", Отклонение="±10 %", Производитель="Vishay Intertechnology, Inc.", Рабочие температуры="от –55 °С до +125 °С", Среднеквадратичный размах пульсации тока="0,06 А", Фамилия=Ларионов, Эквивалентное последовательное сопротивление="19,0 Ом"
C10: library part c0008, "=Описание", HelpURL=http://product.samsungsem.com/mlcc/CL05B682JB5NNN.do, ID=c0008, Корпус=0402, Наименование=CL05B682JB5NNNC, Напряжение="50 В", Номинал=6800, Номинальное напряжение="50 В", Описание="Конденсатор керамический чип 0402 6,8 нФ 50 В ±5 %", Отклонение="±5 %", Производитель="Samsung Electro-Mechanics", Рабочие температуры="от –55 °С до +125 °С", Температурный коэффициент емкости=X7R, Фамилия=Жернаков
C13: library part c0018, "=Описание", HelpURL=https://www.yageo.com/upload/media/product/productsearch/datasheet/mlcc/UPY-NP0X7R_MV_100-to-630V_22.pdf, ID=c0018, Корпус=0603, Наименование=CC0603KRX7R0BB104, Напряжение="100 В", Номинал="0,1 мк", Номинальное напряжение="100 В", Описание="Конденсатор чип 0603 0,1 мкФ 100 В ±10 %", Отклонение="±10 %", Производитель="YAGEO Corp.", Рабочие температуры="от -55 °С до +125 °С", Фамилия=Ларионов
C14: library part c0105, "=Описание", HelpURL=https://www.murata.com/en-global/search/productsearch?cate=cgCapacitors&partno=GRM31CR71E475KA88L, ID=c0122, Корпус=1206, Наименование=GRM31CR71E475KA88L, Напряжение="25 В", Номинал="4,7 мк", Номинальное напряжение="25 В", Описание="Конденсатор чип 1206 4,7 мкФ 25 В ±10 %", Отклонение="±10 %", Производитель=MuRata, Рабочие температуры="от –55 °С до +125 °С", Температурный коэффициент емкости=X7R, Фамилия=Куликов
C15: library part c0058, "=Описание", HelpURL=https://www.yageo.com/upload/media/product/productsearch/datasheet/mlcc/UPY-GPHC_X7R_6.3V-to-50V_20.pdf, ID=c0058, Корпус=0603, Наименование=CC0603KRX7R8BB104, Напряжение="25 В", Номинал="0,1 мк", Номинальное напряжение="25 В", Описание="Конденсатор керамический чип 0603 100 нФ 25 В ±10 %", Отклонение="±10 %", Производитель="YAGEO Corp.", Рабочие температуры="от –55 °С до +125 °С", Температурный коэффициент емкости=X7R, Фамилия=Паньков
C16: library part c0084, "=Описание", HelpURL=https://www.yageo.com/upload/media/product/productsearch/datasheet/mlcc/UPY-GPHC_X5R_4V-to-50V_26.pdf, ID=c0084, Корпус=0402, Наименование=CC0402KRX5R8BB104, Напряжение="25 В", Номинал="0,1 мк", Номинальное напряжение="25 В", Описание="Конденсатор керамический чип 0402 100 нФ 25 В ±10 %", Отклонение="±10 %", Производитель="YAGEO Corp.", Рабочие температуры="от –55 °С до +85 °С", Температурный коэффициент емкости=X5R, Фамилия=Паньков
C17: library part c0019, "=Описание", HelpURL=https://www.yageo.com/upload/media/product/products/datasheet/mlcc/UPY-GPHC_X7R_6.3V-to-50V_20.pdf, ID=c0120, Корпус=0603, Наименование=GRM1885C1H391JA01D, Напряжение="50 В", Номинал="390 п", Номинальное напряжение="50 В", Описание="Конденсатор чип 0603 390 пФ 50 В ±10 %", Отклонение="±10 %", Производитель=MuRata, Рабочие температуры="от –55 °С до +125 °С", Температурный коэффициент емкости=X7R, Фамилия=Куликов
C18 C21: library part c0171, "=Описание", HelpURL=https://www.yageo.com/upload/media/product/productsearch/datasheet/mlcc/UPY-GPHC_X5R_4V-to-50V_26.pdf, ID=c0171, Корпус=1210, Наименование=CC1210KKX5R7BB476, Напряжение="16 В", Номинал="47 мк", Номинальное напряжение="16 В", Описание="Конденсатор керамический чип 1210 47 мкФ 16 В ±10 %", Отклонение="±10 %", Производитель="YAGEO Corp.", Рабочие температуры="от –55 °С до +85 °С", Температурный коэффициент емкости=X5R, Фамилия=Паньков
C19 C20: library part c0081, "=Описание", HelpURL=https://www.yageo.com/upload/media/product/productsearch/datasheet/mlcc/UPY-GPHC_X7R_6.3V-to-50V_20.pdf, ID=c0081, Корпус=0603, Наименование=CC0603KRX7R6BB104, Напряжение="10 В", Номинал="0,1 мк", Номинальное напряжение="10 В", Описание="Конденсатор керамический чип 0603 100 нФ 10 В ±10 %", Отклонение="±10 %", Производитель="YAGEO Corp.", Рабочие температуры="от –55 °С до +125 °С", Температурный коэффициент емкости=X7R, Фамилия=Паньков
DA1 DA2 DD4: library part Component_1
DD1: library part dd0007, "=Описание", HelpURL=https://www.ti.com/product/TPS1663, ID=dd0007, Корпус=HTSSOP-20, Максимальное напряжение="67 В", Наименование=TPS16630PWPR, Напряжение="от 4,5 В до 60 В", Описание="Защитная микросхема eFuse 60 В и 6 А", Производитель="Texas Instruments Inc.", Рабочие температуры="от –40 °С до +125 °С", Ток="от 0,6 А до 6 А", Фамилия=Жернаков
DD2: library part dd0016, "=Описание", HelpURL=https://www.ti.com/product/MAX3232, ID=dd0016, Корпус=SOIC-16, Наименование=MAX3232CDW, Описание="Приемопередатчик RS-232", Производитель="Texas Instruments Inc.", Рабочие температуры="от 0 до +70 °C", Фамилия=Паньков
DD3: library part dd0001, "=Описание", HelpURL=https://www.st.com/en/microcontrollers-microprocessors/stm32f103cb.html, ID=dd0001, Корпус=LQFP-48, Максимальная тактовая частота="72 МГц", Наименование=STM32F103CBT6, Описание="ARM Cortex-M3 32-разрядный микроконтроллер 72 МГц 128 Кбайт FLASH-памяти", Поддерживаемые интерфейсы="CAN, I2C, SPI, USART, USB", Производитель=STMicroelectronics, Рабочее напряжение="от 2,0 В до 3,6 В", Рабочие температуры="от –40 °С до +85 °С", Фамилия=Паньков
HL1: library part hl0001, "=Описание", HelpURL=https://www.vishay.com/leds/list/product-83172/, ID=hl0001, Корпус=0603, Наименование=TLMS1000-GS08, Номинальная длина волны="628 нм", Номинальная сила света="4 мкд", Номинальное падение напряжения="1,8 В", Номинальный прямой ток="15 мА", Описание="Светодиод чип 0603 красный", Производитель="Vishay Intertechnology, Inc.", Рабочие температуры="от –40 °С до +100 °С", Рассеиваемая мощность="40 мВт", Фамилия=Ларионов, Цвет=Red
K1 K2: "General Purpose Relay, Power Pcb Relay Rt1 Series, Power, Non Latching, Spst, 24 Vdc, 16 A", Package=None, Availability=Warning, MF="TE Connectivity", MP=3-1393240-5, Price=None, Purchase-URL=https://pricing.snapeda.com/search/part/3-1393240-5/?ref=eda, SnapEDA_Link=https://www.snapeda.com/parts/3-1393240-5/TE%20Connectivity%20Potter%20&%20Brumfield%20Relays/view-part/309548/?ref=snap
L1: library part l0012, "=Описание", HelpURL=https://www.bourns.com/products/magnetic-products/power-inductors-aec-q200-compliant/product/SRP7028A, ID=l0012, Индуктивность="15 мкГн", Корпус="7,3 x 6,6 x 2,8", Максимальное активное сопротивление="123 мОм", Наименование=SRP7028A-150M, Номинал="15 мкГн", Номинальное активное сопротивление="107 мОм", Номинальный ток (при нагреве на 20 °С/40 °С)="3 А", Описание="Катушка индуктивности 15 мкГн ±20 %", Отклонение="±20 %", Производитель="Bourns, Inc.", Рабочее напряжение="не указано", Рабочие температуры="от –55 °С до +150 °С", Резонансная частота="12 МГц", Ток насыщения="4 А", Фамилия=Ляховский
R1: library part r0160, "=Описание", HelpURL=https://www.yageo.com/upload/media/product/productsearch/datasheet/rchip/PYu-RC_Group_51_RoHS_L_11.pdf, ID=r0160, Корпус=0603, Наименование=RC0603FR-07330KL, Номинал="330 к", Номинальное напряжение="75 В", Номинальный ток="1 А", Описание="Резистор чип 0603 330 кОм ±1 % 0,1 Вт", Отклонение="±1 %", Примечание="Ряд E24", Производитель="YAGEO Corp.", Рабочие температуры="от –55 °С до +155 °С", Фамилия=Паньков
R2: library part r0098, "=Описание", HelpURL=https://www.yageo.com/upload/media/product/productsearch/datasheet/rchip/PYu-RC_Group_51_RoHS_L_11.pdf, ID=r0098, Корпус=0603, Наименование=RC0603FR-076K04L, Номинал="6,04 к", Номинальное напряжение="75 В", Номинальный ток="1 А", Описание="Резистор чип 0603 6,04 кОм ±1 % 0,1 Вт", Отклонение="±1 %", Производитель="YAGEO Corp.", Рабочие температуры="от –55 °С до +155 °С", Фамилия=Ларионов
R3: library part r0111, "=Описание", HelpURL=https://www.yageo.com/upload/media/product/productsearch/datasheet/rchip/PYu-RC_Group_51_RoHS_L_11.pdf, ID=r0111, Корпус=0603, Наименование=RC0603FR-0715KL, Номинал="15 к", Номинальное напряжение="75 В", Номинальный ток="1 А", Описание="Резистор чип 0603 15 кОм ±1 % 0,1 Вт", Отклонение="±1 %", Примечание="Ряд E24", Производитель="YAGEO Corp.", Рабочие температуры="от –55 °С до +155 °С", Фамилия=Паньков
R4: library part r0093, "=Описание", HelpURL=https://www.yageo.com/upload/media/product/productsearch/datasheet/rchip/PYu-RC_Group_51_RoHS_L_11.pdf, ID=r0093, Корпус=0603, Наименование=RC0603FR-074K42L, Номинал="4,42 к", Номинальное напряжение="75 В", Номинальный ток="1 А", Описание="Резистор чип 0603 4,42 кОм ±1 % 0,1 Вт", Отклонение="±1 %", Производитель="YAGEO Corp.", Рабочие температуры="от –55 °С до +155 °С", Фамилия=Жернаков
R5 R6: library part r0034, "=Описание", HelpURL=https://www.yageo.com/upload/media/product/productsearch/datasheet/rchip/PYu-RC_Group_51_RoHS_L_11.pdf, ID=r0034, Корпус=0603, Наименование=RC0603FR-0722RL, Номинал=22, Номинальное напряжение="75 В", Номинальный ток="1 А", Описание="Резистор чип 0603 22 Ом ±1 % 0,1 Вт", Отклонение="±1 %", Примечание="Ряд E24", Производитель="YAGEO Corp.", Рабочие температуры="от –55 °С до +155 °С", Фамилия=Ларионов
R7: library part r0083, "=Описание", HelpURL=https://www.yageo.com/upload/media/product/productsearch/datasheet/rchip/PYu-RC_Group_51_RoHS_L_11.pdf, ID=r0083, Корпус=0603, Наименование=RC0603FR-0747KL, Номинал="47 к", Номинальное напряжение="75 В", Номинальный ток="1 А", Описание="Резистор чип 0603 47 кОм ±1 % 0,1 Вт", Отклонение="±1 %", Производитель="YAGEO Corp.", Рабочие температуры="от –55 °С до +155 °С", Фамилия=Паньков
R8: library part r0023, "=Описание", HelpURL=https://www.yageo.com/upload/media/product/productsearch/datasheet/rchip/PYu-RC_Group_51_RoHS_L_11.pdf, ID=r0023, Корпус=0603, Наименование=RC0603FR-07100KL, Номинал="100 к", Номинальное напряжение="75 В", Номинальный ток="1 А", Описание="Резистор чип 0603 100 кОм ±1 % 0,2 Вт", Отклонение="±1 %", Производитель="YAGEO Corp.", Рабочие температуры="от -55 °С до +155 °С", Фамилия=Водорезов
R9: library part r0084, "=Описание", HelpURL=https://www.yageo.com/upload/media/product/productsearch/datasheet/rchip/PYu-RC_Group_51_RoHS_L_11.pdf, ID=r0084, Корпус=0603, Наименование=RC0603FR-0747KL, Номинал="47 к", Номинальное напряжение="75 В", Номинальный ток="1 А", Описание="Резистор чип 0603 47 кОм ±1 % 0,1 Вт", Отклонение="±1 %", Примечание="Ряд E24", Производитель="YAGEO Corp.", Рабочие температуры="от –55 °С до +155 °С", Фамилия=Паньков
R10: library part r0007, "=Описание", HelpURL=https://www.yageo.com/upload/media/product/productsearch/datasheet/rchip/PYu-RC_Group_51_RoHS_L_11.pdf, ID=r0007, Корпус=0603, Наименование=RC0603FR??07100RL, Номинал=100, Номинальное напряжение="75 В", Номинальный ток="1 А", Описание="Резистор чип 0603 100 Ом ±1 % 0,1 Вт", Отклонение="±1 %", Примечание="Ряд E24", Производитель="YAGEO Corp.", Рабочие температуры="от –55 °С до +155 °С", Фамилия=Самарин
R11: library part r0089, "=Описание", HelpURL=https://www.yageo.com/upload/media/product/productsearch/datasheet/rchip/PYu-RC_Group_51_RoHS_L_11.pdf, ID=r0089, Корпус=0603, Наименование=RC0603FR-0768KL, Номинал="68 к", Номинальное напряжение="75 В", Номинальный ток="1 А", Описание="Резистор чип 0603 68 кОм ±1 % 0,1 Вт", Отклонение="±1 %", Производитель="YAGEO Corp.", Рабочие температуры="от –55 °С до +155 °С", Фамилия=Паньков
R12: library part r0115, "=Описание", HelpURL=https://www.yageo.com/upload/media/product/productsearch/datasheet/rchip/PYu-RC_Group_51_RoHS_L_11.pdf, ID=r0115, Корпус=0603, Наименование=RC0603FR-0720KL, Номинал="20 к", Номинальное напряжение="75 В", Номинальный ток="1 А", Описание="Резистор чип 0603 20 кОм ±1 % 0,1 Вт", Отклонение="±1 %", Примечание="Ряд E24", Производитель="YAGEO Corp.", Рабочие температуры="от –55 °С до +155 °С", Фамилия=Паньков
R13 R14: library part r0076, "=Описание", HelpURL=https://www.yageo.com/upload/media/product/productsearch/datasheet/rchip/PYu-RC_Group_51_RoHS_L_11.pdf, ID=r0076, Корпус=0603, Наименование=RC0603FR-071KL, Номинал="1 к", Номинальное напряжение="75 В", Номинальный ток="1 А", Описание="Резистор чип 0603 1 кОм ±1 % 0,1 Вт", Отклонение="±1 %", Примечание="Ряд E24", Производитель="YAGEO Corp.", Рабочие температуры="от –55 °С до +155 °С", Фамилия=Ларионов
R15 R16: library part r0105, "=Описание", HelpURL=https://www.yageo.com/upload/media/product/productsearch/datasheet/rchip/PYu-RC_Group_51_RoHS_L_11.pdf, ID=r0105, Корпус=0603, Наименование=RC0603FR-0710KL, Номинал="10 к", Номинальное напряжение="75 В", Номинальный ток="1 А", Описание="Резистор чип 0603 10 кОм ±1 % 0,1 Вт", Отклонение="±1 %", Примечание="Ряд E24", Производитель="YAGEO Corp.", Рабочие температуры="от –55 °С до +155 °С", Фамилия=Самарин
R17: library part r0052, "=Описание", HelpURL=https://www.yageo.com/upload/media/product/productsearch/datasheet/rchip/PYu-RC_Group_51_RoHS_L_11.pdf, ID=r0052, Корпус=0603, Наименование=RC0603FR??07100RL, Номинал=100, Номинальное напряжение="75 В", Номинальный ток="1 А", Описание="Резистор чип 0603 100 Ом ±1 % 0,1 Вт", Отклонение="±1 %", Примечание="Ряд E24", Производитель="YAGEO Corp.", Рабочие температуры="от –55 °С до +155 °С", Фамилия=Самарин
S1: library part s0003, "=Описание", HelpURL=https://components.omron.com/product-detail?partId=468, ID=s0003, Количество контактов=4, Корпус="6,00 x 6,60 x 4,30", Наименование=B3S-1002, Описание="Тактовая кнопка поверхностного монтажа", Производитель="OMRON Corporation", Промывка=Разрешена, Рабочие температуры="от –25 °С до +70 °С", Сопротивление контакта="100 мОм", Ток нагрузки="50 мА @ 24 В", Фамилия=Засецкий
S2: library part s0001, "=Описание", HelpURL=https://www.te.com/usa-en/product-4-1437565-1.html, ID=s0001, Количество контактов=4, Корпус="6,00 x 6,00 x 4,98", Наименование=FSM4JSMA, Описание="Тактовая кнопка поверхностного монтажа", Производитель="TE Connectivity", Промывка=Запрещена, Рабочие температуры="от –35 °С до +85 °С", Сопротивление контакта="100 мОм", Ток нагрузки="50 мА @ 24 В", Фамилия=Паньков
VD1: library part vd0003, "=Описание", HelpURL=https://www.vishay.com/product?docid=88740, ID=vd0003, Корпус=DO-214AC, Максимальное обратное напряжение="30 В", Максимальное прямое напряжение="0,445 В", Максимальный прямой ток="1,5 А", Наименование=SL13-E3/5AT, Описание="Диод Шоттки 30 В 1,5 А", Производитель="Vishay Intertechnology, Inc.", Рабочие температуры="от –55 °С до +125 °С", Фамилия=Ларионов
VD2 VD3: library part vd0004, "=Описание", HelpURL=https://www.littelfuse.com/products/tvs-diode-arrays/general-purpose-esd-protection/sdc/sd12c_01ftg.aspx, ID=vd0004, Корпус=SOD-323, Наименование=SD12C-01FTG, Описание="Двунаправленная диодная сборка для подавления помех 12 В", Производитель="Littelfuse, Inc.", Фамилия=Ларионов
VD4 VD5 VD6: library part vd0005, "=Описание", HelpURL=https://www.vishay.com/product?docid=88751, ID=vd0005, Корпус=DO-214AB, Максимальное обратное напряжение="60 В", Максимальное прямое напряжение="0,75 В", Максимальный прямой ток="3 А", Наименование=SS36-E3/57T, Описание="Диод Шоттки 60 В 3 А", Производитель="Vishay Intertechnology, Inc.", Рабочие температуры="от –55 °С до +150 °С", Фамилия=Жернаков
VT1 VT2: library part vt0005, "=Описание", HelpURL=https://www.ti.com/product/CSD19532Q5B, ID=vt0005, Корпус=SON-8, Наименование=CSD19532Q5BT, Напряжение затвор — исток="±20 В", Напряжение сток — исток="100 В", Описание="Полевой N-канальный МДП-транзистор 100 В 17 А", Производитель="Texas Instruments Inc.", Рабочие температуры="от –55 °С до +150 °С", Сопротивление сток — исток="5,7 мОм", Ток стока="17 А", Фамилия=Жернаков
X1: library part x0032, "=Описание", Contact_1=+24V_IN, Contact_2=GND, HelpURL=http://en.connfly.group/product/xVkr=EusQssAN0gN=Aos=mU+UrVkR9kqEAN0gN0AUCUNB+A, ID=x0032, Наименование=DS1023-1x2SF11, Описание="PBS 2 pin 2,54 мм гнездо прямой", Производитель="Connfly Electronic Co., Ltd.", Фамилия=Паньков
X2: library part x0023, "=Описание", Contact_1=TX, Contact_2=GND, Contact_3=RX, HelpURL=http://en.connfly.group/product/xVkr=EusQssAN0gN=Aos=mU+UrVkR9kqEAN0gN0MUR+g+NB+A, ID=x0023, Наименование=DS1069-3MRW6XA, Описание="CWF 3 pin Type A 2,5 мм вилка угловой", Производитель="Connfly Electronic Co., Ltd.", Фамилия=Паньков
X3 X4: library part x0008, "=Описание", Contact_1=K+, Contact_2=K-, HelpURL=https://www.te.com/usa-en/product-826629-2.html, ID=x0008, Наименование=826629-2, Описание="PLS 2 pin 2,54 мм вилка прямой", Производитель="TE Connectivity", Фамилия=Архипов
X5 X6 X7 X8 X9 X10: library part x0005, "=Описание", Contact_1=220V_OUT, Contact_2=220V_IN, HelpURL=https://www.te.com/usa-en/product-1776275-2.html, ID=x0005, Наименование=1776275-2, Описание="Terminal Block 2 pin 3,5 мм", Производитель="TE Connectivity", Фамилия=Паньков

## Free pads (board coordinates)
  round 6.2 hole 2.7: 2(55,53) 2(55,110) 2(145,53) 2(145,110)

## Via types
v1: diameter 0.6, hole 0.3, Top Layer to Bottom Layer, tented both sides, 1068 vias
v2: diameter 0.6, hole 0.3, Top Layer to Bottom Layer, 67 vias

## Nets (pads, with @x,y where several pads share a name; then routed paths per layer and width w, separated by ;. In a path a pad name is that pad's centre, name@x,y a point inside that pad or via, vN(x,y) a via of type N, cw(c..) or ccw(c..) an arc to the next point about the centre after c; other vN are vias at no path point)
+3,3V: C1.1 C2.1 C3.1 C5.1 C6.1 C7.1 C17.1 C18.1 C19.1 C20.1 C21.1 DA1.4 DA2.4 DD2.16 DD3.1 DD3.9 DD3.24 DD3.36 DD3.48 L1.2 R8.2 R9.2 R11.2 R17.2 | length 59.7
  Top Layer w0.2: DD3.48 90.275,94.525 90.782,94.525 91.75,95.493 DD3.36 ; DD3.9 95.75,92.525 95.6,92.375 95.6,92.343 95.007,91.75 91.867,91.75 91.75,91.867 DD3.1 91.75,93.475 91.449,93.776 91.224,93.776 91.083,93.917 91.083,94.083 97,100 DD3.24
  Top Layer w0.6: R17.2 v2(59,91) ; R9.2 85,100 v2(85.25,100.25)
  Bottom Layer w0.6: v2(59,91) 76,91 v2(85.25,100.25)
  other v2: 72.25,60 73.25,60 74.25,60 72.25,61 73.25,61 74.25,61 95.5,62.75 96.5,62.75 97.5,62.75 98.5,62.75 99.5,62.75 92,87.75 90.75,92.5 89.75,93.5 90.75,93.5 89,94.25 78.25,101.75 79.5,101.75 80.75,101.75 78.25,102.75 79.5,102.75 80.75,102.75 78.25,103.75 79.5,103.75 80.75,103.75 78.25,104.75 79.5,104.75 80.75,104.75 78.25,105.75 79.5,105.75 80.75,105.75 78.25,107 79.5,107 80.75,107 74.5,108.25 75.75,108.25 77,108.25 78.25,108.25 79.5,108.25 80.75,108.25
+24V: 
+24V_IN: C4.1 DD1.1 DD1.2 DD1.3 DD1.6 R1.2 VD1.1
+24V_IN_PROT: C14.1 DD1.18 DD1.19 DD1.20 DD4.2 DD4.3 K1.A1 K2.A1 VD5.1 VD6.1 | length 42.2
  Top Layer w1: C14.1 v2(76.75,88.75) ; v2(110,84.5) VD6.1
  Signal Layer 2 w1: v2(76.75,88.75) 81,84.5 v2(110,84.5)
BOOT: C16.2 DD4.1 | length 3.2
  Top Layer w0.3: C16.2 70.995,91 72.095,92.1 DD4.1
FB: C17.2 DD4.5 R11.1 R12.2 | length 7.1
  Top Layer w0.4: DD4.5 75.905,98.4 76.005,98.5 C17.2 R11.1 R12.2
GND: C1.2 C2.2 C3.2 C4.2 C5.2 C6.2 C7.2 C8.2 C9.1 C10.2 C13.2 C14.2 C15.2 C18.2 C19.2 C20.2 C21.2 DA1.1 DA1.2 DA2.1 DA2.2 DD1.0 DD1.9 DD2.15 DD3.8 DD3.23 DD3.35 DD3.44 DD3.47 DD4.7 DD4.9 HL1.1 R3.1 R4.1 R7.1 R12.1 R15.1 R16.1 S1.1 S2.2 VD2.2 VD3.2 VD4.2 VT1.S VT2.S X1.2 X2.2 X3.2 X4.2 | length 22.6
  Top Layer w0.2: C15.2 87.225,95.025 90.225,95.025 DD3.47
  Top Layer w0.3: DD2.15 73.387,63.288 75.462,63.288 v2(75.5,63.25)
  Top Layer w0.6: S1.1@84,82.775 S1.1@84,90.725 ; S2.2@91.2,109.49 S2.2@100.3,109.49